# EAGLE board acd run final layout 1 (EAGLE 8.5.0)
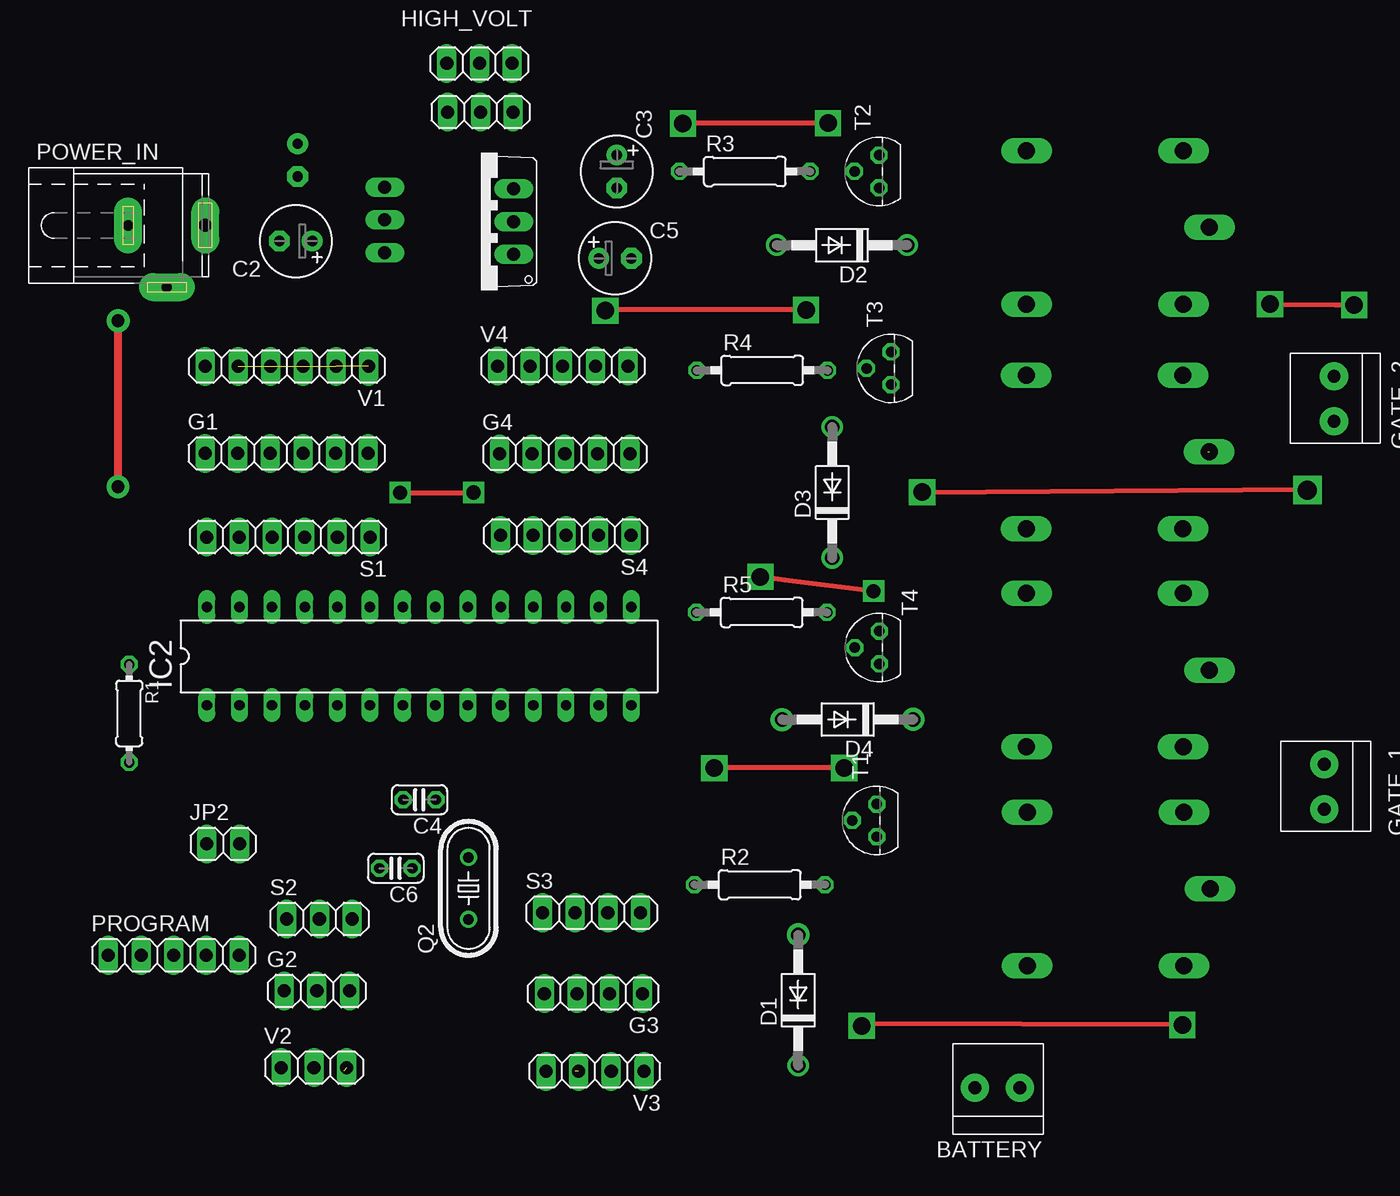
[diagram p0: board, top side]
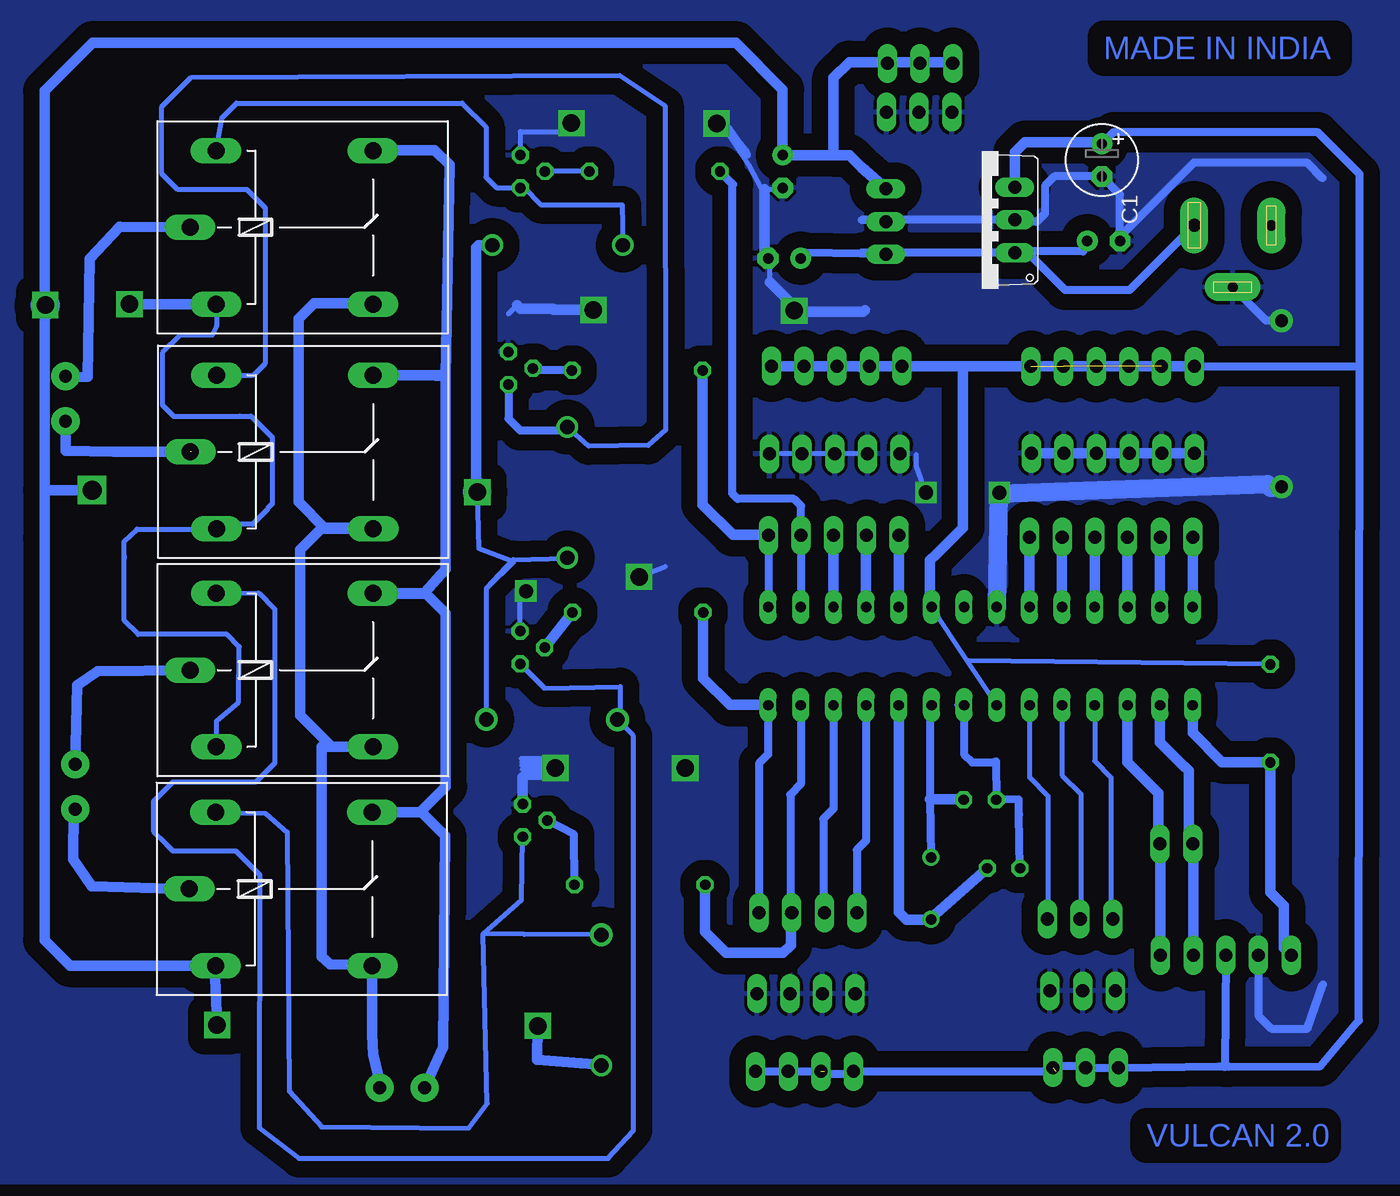
[diagram p1: board, bottom side, seen from below]

No outline drawn. Coordinates in mm, seen from the top.
Copper layers (1*16): Top 0.035mm / dielectric 1.5mm / Bottom 0.035mm
Design rules "default": minimum track width 10mil, minimum drill 24mil, track to track 8mil, track to pad 8mil, pad to pad 8mil, via to via 8mil, smd to smd 8mil, copper to edge 40mil, drill to drill 8mil, minimum pad ring 10mil, minimum via ring 8mil, stop-mask expansion 4mil, vias tented up to drill 0mil, thermal gap 10mil

## Footprints (pad centres in the part's own frame; a part is rotated, then mirrored left to right if it is on the bottom)
1X2-3.5MM = drill 1 pad 2.184: 1 1.8,0; 2 -1.7,0
E2,5-6 = drill 0.813 pad 1.6: + -1.27,0 | drill 0.813 pad 1.6 octagon: - 1.27,0
C025-024X044 = drill 0.813 octagon: 1 -1.27,0; 2 1.27,0
DO41-10 = drill 1.118: A 5.08,0; C -5.08,0
1X06 = drill 1.016 long: 1 -6.35,0; 2 -3.81,0; 3 -1.27,0; 4 1.27,0; 5 3.81,0; 6 6.35,0
1X03 = drill 1.016 long: 1 -2.54,0; 2 0,0; 3 2.54,0
1X04 = drill 1.016 long: 1 -3.81,0; 2 -1.27,0; 3 1.27,0; 4 3.81,0
1X05 = drill 1.016 long: 1 -5.08,0; 2 -2.54,0; 3 0,0; 4 2.54,0; 5 5.08,0
TO220V = drill 1.016 long: 1 -2.54,-2.54; 2 0,-2.54; 3 2.54,-2.54
DIL28-3 = drill 0.813 long: 1 -16.51,-3.81; 2 -13.97,-3.81; 3 -11.43,-3.81; 4 -8.89,-3.81; 5 -6.35,-3.81; 6 -3.81,-3.81; 7 -1.27,-3.81; 8 1.27,-3.81; 9 3.81,-3.81; 10 6.35,-3.81; 11 8.89,-3.81; 12 11.43,-3.81; 13 13.97,-3.81; 14 16.51,-3.81; 15 16.51,3.81; 16 13.97,3.81; 17 11.43,3.81; 18 8.89,3.81; 19 6.35,3.81; 20 3.81,3.81; 21 1.27,3.81; 22 -1.27,3.81; 23 -3.81,3.81; 24 -6.35,3.81; 25 -8.89,3.81; 26 -11.43,3.81; 27 -13.97,3.81; 28 -16.51,3.81
1X02 = drill 1.016 long: 1 -1.27,0; 2 1.27,0
G5LE = drill 1.321 long: 1 -7.493,-5.969; 2 -7.493,5.969; O 4.699,5.969; P -9.525,0; S 4.699,-5.969
SPC4077 = drill 0.8 pad 2.184 long: 1 -3,0; 2 0,-4.8 | drill 1 pad 2.184 long: 3 3,0
HC49/S = drill 0.813: 1 -2.413,0; 2 2.413,0
0204/7 = drill 0.813 octagon: 1 -3.81,0; 2 3.81,0
0207/10 = drill 0.813 octagon: 1 -5.08,0; 2 5.08,0
TO92 = drill 0.813 octagon: 1 1.27,0; 2 0,1.905; 3 -1.27,0

## Placement (x,y rotation side)
BATTERY  [1X2-3.5MM]  71.41,1.64 0 top
C1  [E2,5-6]  17.03,73.76 270 bottom
C2  [E2,5-6]  16.89,67.46 180 top
C3  [E2,5-6]  41.85,72.87 270 top
C4  [C025-024X044]  26.51,24.03 180 top
C5  [E2,5-6]  41.72,66.12 0 top
C6  [C025-024X044]  24.67,18.7 180 top
D1  1N4004  [DO41-10]  55.95,8.44 90 top
D2  1N4004  [DO41-10]  59.36,67.14 180 top
D3  1N4004  [DO41-10]  58.61,47.92 90 top
D4  1N4004  [DO41-10]  59.81,30.26 180 top
G1  [1X06]  16.17,50.95 0 top
G2  [1X03]  18.52,9.16 0 top
G3  [1X04]  40.02,8.96 180 top
G4  [1X05]  37.81,50.91 0 top
GATE_1  [1X2-3.5MM]  96.88,25 90 top
GATE_2  [1X2-3.5MM]  97.63,55.15 90 top
HIGH_VOLT  [1X03]  31.17,81.27 180 top
IC1  7812TV  [TO220V]  31.29,68.97 90 top
IC2  MEGA8-P  [DIL28-3]  26.47,35.19 0 top
IC4  7812TV  [TO220V]  26.34,69.11 90 bottom
JP1  [1X03]  31.24,77.49 0 top
JP2  [1X02]  11.24,20.6 0 top
K1  G5LE  [G5LE]  78.42,68.53 0 bottom
K2  G5LE  [G5LE]  78.39,51.07 0 bottom
K3  G5LE  [G5LE]  78.41,34.1 0 bottom
K4  G5LE  [G5LE]  78.47,17.1 0 bottom
POWER_IN  [SPC4077]  6.85,68.68 0 top
PROGRAM  [1X05]  7.39,11.94 0 top
Q2  [HC49/S]  30.32,17.14 90 top
R1  [0204/7]  3.93,30.74 270 top
R2  [0207/10]  52.97,17.42 0 top
R3  [0207/10]  51.81,72.87 0 top
R4  [0207/10]  53.16,57.41 0 top
R5  [0207/10]  53.12,38.59 0 top
S1  [1X06]  16.31,44.45 180 top
S2  [1X03]  18.72,14.76 0 top
S3  [1X04]  39.88,15.24 0 top
S4  [1X05]  37.89,44.58 180 top
T1  BC547  [TO92]  62.06,22.42 90 top
T2  BC547  [TO92]  62.25,72.87 90 top
T3  BC547  [TO92]  63.18,57.57 90 top
T4  BC547  [TO92]  62.27,35.86 90 top
V1  [1X06]  16.2,57.71 180 top
V2  [1X03]  18.3,3.21 0 top
V3  [1X04]  40.15,2.92 180 top
V4  [1X05]  37.65,57.74 0 top

## Library data of the parts
BATTERY GATE_1 GATE_2 = adafruit
C1-C6 R1-R5 = rcl
D1-D4 = diode
G1-G4 HIGH_VOLT JP1 JP2 PROGRAM S1-S4 V1-V4 = pinhead
IC1 IC4 = linear
IC2 = atmel; OC_FARNELL: unknown; OC_NEWARK: unknown
K1-K4 = relay; OC_FARNELL: unknown; OC_NEWARK: unknown
POWER_IN = con-jack; OC_FARNELL: unknown; OC_NEWARK: unknown
Q2 = crystal; OC_FARNELL: 1667008; OC_NEWARK: unknown
T1-T4 = transistor

## Nets
+5V: C1.+ IC2.7 IC2.20 IC4.3 PROGRAM.3 R1.1 V1.1 V1.2 V1.3 V1.4 V1.5 V1.6 V2.1 V2.2 V2.3 V3.1 V3.2 V3.3 V3.4 V4.1 V4.2 V4.3 V4.4 V4.5
GND: C1.- C2.- C3.- C5.- G1.1 G1.2 G1.3 G1.4 G1.5 G1.6 G2.1 G2.2 G2.3 G3.1 G3.2 G3.3 G3.4 G4.1 G4.2 G4.3 G4.4 G4.5 IC1.2 IC2.22 IC4.2 JP1.1 JP1.2 JP1.3 POWER_IN.2 PROGRAM.2 T1.1 T2.1 T3.1 T4.1
IPJUMPERS: IC2.1 PROGRAM.1 R1.2
N$1: C4.1 IC2.9 Q2.2
N$2: C6.1 IC2.10 Q2.1
N$3: IC2.28 S1.6
N$4: IC2.27 S1.5
N$5: IC2.6 S2.3
N$7: C3.+ D1.C HIGH_VOLT.1 HIGH_VOLT.2 HIGH_VOLT.3 IC1.3 K4.1
N$8: IC2.26 S1.4
N$9: IC2.25 S1.3
N$10: IC2.24 S1.2
N$13: IC2.23 S1.1
N$14: IC2.19 S4.5
N$15: IC2.5 S2.2
N$17: IC2.18 S4.4
N$19: IC2.17 S4.3
N$23: IC2.16 R3.1 S4.2
N$25: IC2.14 R5.1 S3.4
N$35: IC2.13 R2.1 S3.3
N$40: D1.A K4.2 T1.3
N$41: D2.A K1.2 T2.3
N$43: D3.A K2.2 T3.3
N$44: IC2.4 S2.1
N$45: IC2.3 JP2.2 PROGRAM.5
N$46: IC2.2 JP2.1 PROGRAM.4
N$47: K1.O K2.O K3.O K4.O
N$48: C2.+ C5.+ IC1.1 IC4.1 POWER_IN.3
N$49: IC2.15 R4.1 S4.1
N$50: D4.A K3.2 T4.3
N$51: K1.S K2.S K3.S K4.S
N$52: R5.2 T4.2
N$53: R4.2 T3.2
N$54: IC2.12 S3.2
N$55: K2.P
N$56: K3.P
N$57: K4.P
N$58: R3.2 T2.2
N$59: R2.2 T1.2
N$60: IC2.11 S3.1
R1OUT: K1.P
S$25: K1.1 K2.1 K3.1
S$26: D2.C D3.C D4.C
S$28: C4.2 C6.2 IC2.8

## Tracks (layer width: path | path; a pad name or v marks a point on that pad's centre or on a via)
+5V  (6 unrouted)
  Bottom 0.406: IC2.20 27.51,34.84 | 27.51,34.84 IC2.7 | R1.1 27.43,34.84 27.51,34.84 | C1.+ 17.15,75.15 | IC4.3
  Bottom 0.61: 7.59,3.32 7.17,3.28 0.03,3.33 -2.97,6.88 -3.01,57.7 | -3.01,57.7 -3.01,72.67 0.23,75.91 16.15,75.91 C1.+ | V3.1 V3.2 38.59,2.92 38.38,2.71 36.54,2.71 V3.4 20.62,2.92 20.18,3.36 18.45,3.36 V2.2 V2.1 7.94,3.3 7.59,3.32 | PROGRAM.3 7.47,3.27 7.59,3.32 | V1.1 -2.99,57.71 -3.01,57.7
  Bottom 0.813: V1.6 V1.1 | V1.1 32.57,57.71 V4.1 V4.2 | V4.2 35.74,57.74 35.74,57.61 35.11,57.61 V4.2 | V4.2 V4.3 V4.4 V4.5 | V1.1 27.82,57.71 27.82,45.19 29.89,43.12 29.91,43.12 30.39,42.65 30.39,39.1 IC2.20 | 17.15,75.15 23.01,75.15 23.81,74.35 IC4.3
GND  (via drill 1 pad 1.78, 1.11, 1.36, 1.36 pad 1.42)
  Top 0.406: v25,47.9 30.68,47.9 v30.71,47.91 | v58.27,76.63 47.01,76.63 v46.99,76.61 | v56.57,62.1 41.04,62.13 v40.97,62.05 | v59.53,26.5 49.72,26.5 v49.43,26.48 | v61.82,40.24 54.92,41.1 v53.02,41.36
  Top 0.61: v3.06,48.37 v3.06,61.27
  Bottom 0.406: IC2.22 v25,47.9 24.99,47.85 | 22.9,50.02 G1.6 | POWER_IN.2 6.75,63.79 | G4.2 G4.3 G4.4 G4.5 | v30.71,47.91 31.46,49.96 31.46,50.86 | T2.1 62.25,75.95 62.27,75.97 58.93,75.97 v58.27,76.63 | v46.99,76.61 46.21,76.61 45.33,75.33 44.7,74.56 44.53,74.09 46.4,76.28 44.42,73.29 43.49,71.53 43.28,71.48 41.97,71.48 C3.- | 63.18,61.81 62.52,62.47 | v40.97,62.05 39.46,62.05 | 40.52,61.95 42.83,64.26 42.83,65.96 C5.- | 62.06,25.96 61.88,26.13 59.9,26.13 v59.53,26.5 | v49.43,26.48 49.32,26.62 | T4.1 62.27,39.65 61.97,39.95 61.75,39.91 v61.82,40.24 | v53.02,41.36 51,42.16 | 62.06,25.78 60.07,25.78 | 62.11,26.38 60.12,26.38 | 62.14,26.68 60.15,26.68 | 62.14,26.93 60.15,26.93 | 62.13,27.17 60.14,27.17 | 62.17,27.25 60.19,27.25
  Bottom 0.61: PROGRAM.2 4.85,7.25 3.85,6.24 1.04,6.24 -0.17,9.67 | IC1.2 35.71,69.11 IC4.2 23.64,68.95 22.09,68.95 21.45,69.58 21.45,71.75 20.71,72.49 C1.- 15.62,71.08 C2.- 15.62,67.79 9.84,73.57 1.09,73.57 -0.13,72.35 | v3.06,61.27 4.25,61.27 POWER_IN.2
  Bottom 0.813: G1.1 G1.6 | 43.28,71.48 43.28,66.41 C5.- | v56.57,62.1 59.66,62.13 59.72,62.19 62.24,62.19 62.52,62.47 | 40.52,61.95 35.61,61.95 35.45,62.1 | v40.97,62.05 40.97,62.39 42.83,64.26 | T1.1 62.06,25.78
  Bottom 1.422: IC2.22 25.02,47.88 25.05,47.82 4.18,48.57 3.91,48.3 3.13,48.3 v3.06,48.37
  pour Bottom (isolate 1.27): 103.8,86.43 103.8,-5.65 -6.8,-5.65 -6.76,86.43
IPJUMPERS
  Bottom 0.813: R1.2 | R1.2 3.93,16.84 2.89,15.8 2.89,12.51 PROGRAM.1 | IC2.1 9.96,29.22 7.7,26.95 3.95,26.95 R1.2
N$1
  Bottom 0.406: C4.1 28.06,24.07
  Bottom 0.61: IC2.9 30.41,31.38 30.41,24.07 Q2.2
  Bottom 0.813: 28.06,24.07 30.41,24.07
N$2
  Bottom 0.813: IC2.10 32.82,15.29 32.23,14.7 30.34,14.7 Q2.1 30.32,14.83 C6.1
N$3
  Bottom 0.813: S1.6 IC2.28
N$4
  Bottom 0.813: IC2.27 S1.5
N$5
  Bottom 0.406: IC2.6 22.66,25.76 21.21,24.31 21.21,14.81 S2.3
N$7  (via drill 1.36, 1.36 pad 1.42)
  Top 0.406: v85.83,6.53 60.84,6.6 v60.9,6.46
  Bottom 0.406: 41.81,74.18 C3.+ | HIGH_VOLT.1 HIGH_VOLT.2 HIGH_VOLT.3 | 85.84,6.55 85.67,6.62 85.69,6.6
  Bottom 0.813: D1.C 55.9,3.42 57.52,3.55 60.96,3.82 v60.9,6.46 | 85.84,6.55 86.03,11.1 K4.1 85.97,11.14 97.27,11.14 99.24,13.11 99.24,44.37 | 99.24,44.37 99.24,79.15 95.5,82.89 45.5,82.89 41.85,79.24 C3.+ 37.86,74.13 | 99.24,44.37 | IC1.3 35.74,73.21 36.66,74.13 37.86,74.13 | 37.86,74.13 37.9,74.17 37.9,80.14 36.67,81.37 28.73,81.37 HIGH_VOLT.3 | 85.69,6.6 85.73,6.59 v85.83,6.53
N$8
  Bottom 0.813: IC2.26 S1.4
N$9
  Bottom 0.813: IC2.25 S1.3
N$10
  Bottom 0.813: IC2.24 S1.2
N$13
  Bottom 0.813: S1.1 IC2.23
N$14
  Bottom 0.813: S4.5 32.81,39.01 IC2.19
N$15
  Bottom 0.406: IC2.5 20.12,25.95 18.65,24.48 18.65,14.82 S2.2
N$17
  Bottom 0.813: IC2.18 35.36,44.57 S4.4
N$19
  Bottom 0.813: S4.3 37.89,39.01 IC2.17
N$23
  Bottom 0.61: 45.71,71.85 45.76,71.91 | R3.1 45.87,72.01 45.76,71.91 | IC2.16 40.43,39.01 S4.2 40.43,46.87 40.98,47.42 45.36,47.42 45.76,47.83 45.76,71.91
N$25
  Bottom 0.61: 43.03,31.42 IC2.14 42.98,27.55 43.68,26.85 43.68,15.25 S3.4
  Bottom 0.813: R5.1 48.04,33.49 45.95,31.41 43.01,31.41 IC2.14
N$35
  Bottom 0.61: IC2.13 40.44,25.25 41.26,24.43 41.26,15.36 S3.3
  Bottom 0.813: R2.1 47.89,13.76 46.25,12.12 41.81,12.12 41.22,12.71 41.22,15.18 S3.3
N$40
  Bottom 0.406: K4.2 82.08,22.98 80.37,21.51 80.23,1.35 77.71,-1.41 66.26,-1.5 64.84,0.4 65.15,13.62 | 65.15,13.62 62.17,16.25 T1.3 | D1.A 61.94,13.56 65.15,13.62
N$41
  Bottom 0.406: K1.2 85.45,77.05 84.32,78.18 66.78,78.18 64.93,76.33 64.93,72.44 64.11,71.62 62.26,71.62 T2.3 61.97,71.6 60.67,70.29 54.34,70.27 D2.A
N$43
  Bottom 0.406: K2.2 83,57.04 82.07,57.97 82.07,70.02 83.52,71.47 88.89,71.47 90.13,72.71 90.13,77.9 87.84,80.19 54.52,80.33 51.02,77.98 50.96,52.77 52.3,51.57 56.95,51.53 D3.A
  Bottom 0.61: T3.3 63.18,53.66 62.26,52.74 58.6,52.74 D3.A
N$44
  Bottom 0.406: IC2.4 17.58,27.02 16.31,25.75 16.31,14.89 S2.1
N$45
  Bottom 0.813: PROGRAM.5 12.47,20.56 JP2.2 12.62,20.71 12.62,24.54 15.04,26.96 IC2.3
N$46
  Bottom 0.813: PROGRAM.4 9.93,20.56 JP2.1 10.28,20.9 10.28,26.3 10.58,26.61 10.62,26.61 12.5,28.5 IC2.2
N$47
  Bottom 0.813: 69.78,1.49 68.26,4.79 68.11,21.24 69.94,23.07 K4.O 70.03,23.07 68.06,25.05 68.06,38.52 69.59,40.06 73.87,40.06 K3.O 69.71,40.1 68.07,41.93 68.08,57.16 68.8,56.99 73.85,57.06 K2.O 68.82,57.03 68.08,56.91 67.77,73.4 68.91,74.53 73.24,74.53 K1.O
N$48
  Bottom 0.61: IC4.1 35.71,66.56 IC1.1 40.04,66.53 C5.+ | IC4.1 22.79,66.56 19.89,63.67 14.86,63.67 POWER_IN.3 | C2.+ 18.16,66.99 18.5,66.65 23.71,66.65 IC4.1
N$49
  Bottom 0.61: 43.06,44.68 S4.1 42.97,39.01 IC2.15
  Bottom 0.813: R4.1 48.08,46.98 45.72,44.62 43,44.62 S4.1
N$50
  Bottom 0.406: T4.3 60.38,32.7 54.48,32.83 54.49,30.5 D4.A 53.46,29 53.46,-1.7 55.43,-3.85 79.47,-3.85 82.56,-1.48 82.52,18.18 82.88,18.54 82.88,18.55 84.38,20.06 89.28,20.06 89.81,20.58 89.81,20.6 90.8,21.59 90.8,23.88 89.28,25.4 82.84,25.4 81.36,26.88 81.36,38.84 82.61,40.1 K3.2
N$51
  Bottom 0.813: 73.19,1.72 73.17,1.96 73.7,4.24 73.77,5.77 K4.S 73.8,11.16 77.05,11.22 77.7,11.82 77.71,25.72 77.72,28.15 K3.S 76.94,28.16 79.39,30.61 79.39,43.48 77.68,45.19 73.95,45.19 K2.S 77.42,45.1 79.51,47.19 79.51,61.41 78.29,62.63 73.28,62.63 K1.S
N$52
  Bottom 0.406: 60.23,35.99 T4.2
  Bottom 0.813: R5.2 T4.2
N$53
  Bottom 0.61: R4.2 61.12,57.41 T3.2
N$54
  Bottom 0.61: IC2.12 37.9,23.34 38.69,22.55 38.69,15.32 S3.2
N$55  (1 unrouted)
  Bottom 0.813: 97.66,53.56 97.61,51.17 93.87,51.09 87.8,51.09 87.59,50.88
N$56
  Bottom 0.813: K3.P 95.12,34.03 96.72,32.94 96.88,26.76 96.82,26.95
N$57
  Bottom 0.813: 96.97,23.34 97.03,19.42 95.59,17.31 88.04,17.06 K4.P
N$58
  Bottom 0.406: R3.2 T2.2
N$59
  Bottom 0.61: R2.2 58.08,21.34 T1.2
N$60
  Bottom 0.61: IC2.11 35.36,20.85 36.08,20.13 36.08,15.26 S3.1
R1OUT
  Bottom 0.813: K1.P 93.41,68.58 95.75,66.08 95.9,56.92 97.8,56.84
S$19  (via drill 1 pad 1.78)
  other vias: 54.71,30.26
S$20  (via drill 1 pad 1.78)
  other vias: 64.9,30.28
S$24  (via drill 1 pad 1.78)
  other vias: 55.96,13.53
S$25  (via drill 1.36 pad 1.42)
  Top 0.406: v99.2,62.49 97.73,62.51 v92.64,62.55
  Bottom 0.406: 99.3,62.44 99.27,62.47 v99.2,62.49 | 92.09,62.61 v92.64,62.55 | K1.1 85.88,60.85 86.2,60.14 88.71,60.14 90.09,58.77 90.09,54.72 89.2,53.83 84.07,53.83 84.05,53.85 83.2,53.85 81.55,52.2 81.55,47.03 81.93,46.64 81.93,46.56 83.06,45.43 85.86,45.43 86.48,44.81 | K2.1 86.36,44.8 86.36,44.58 86.48,44.7 86.48,44.81 | 86.48,44.81 86.73,45.06 92.05,45.06 93.06,44.14 93.06,42.92 93.06,42.84 93.06,37.95 91.99,36.88 85.06,36.88 84.11,35.93 84.17,31.62 85.89,30.17 K3.1
  Bottom 0.813: K1.1 v92.64,62.56 v92.64,62.55
S$26  (via drill 1.36 pad 1.42, 1.48 pad 1.42)
  Top 0.406: v95.56,48.1 95.49,48.18 v65.59,47.94
  Bottom 0.406: 99.26,48.1 99.3,48.05 | v65.59,47.94 v65.59,47.93 65.48,43.55 62.78,42.54 62.75,42.58 64.87,40.46 64.89,40.46 | D3.C 58.57,42.8 62.81,42.69 64.89,40.46 | D4.C 64.89,40.46
  Bottom 0.813: v95.56,48.1 99.26,48.1 | D2.C 65.49,67.14 65.68,66.95 65.68,48.07 v65.59,47.94
S$27
  Bottom 0.406: 99.33,45.48 99.3,45.65
S$28
  Bottom 0.406: IC2.8 28.33,31.38
  Bottom 0.61: IC2.8 27.74,27.57 27.11,26.93 25.52,26.93 25.27,27.01 C4.2 23.48,24.07 23.47,22.87 C6.2
(copper drawn outside any net)
  shapes: Bottom circle x3

## Text on the board
Bottom: MADE IN INDIA | VULCAN 2.0